# Altium PCB TSSOP_Adapt.PcbDoc
Units mm, origin at the board's own origin, x right, y up, seen from the top; angles counter-clockwise.
Board outline 152.4 x 101.6 mm, 2 copper layers (Top Layer, Bottom Layer); 2 components, 0 nets, 32 pads, 0 vias.
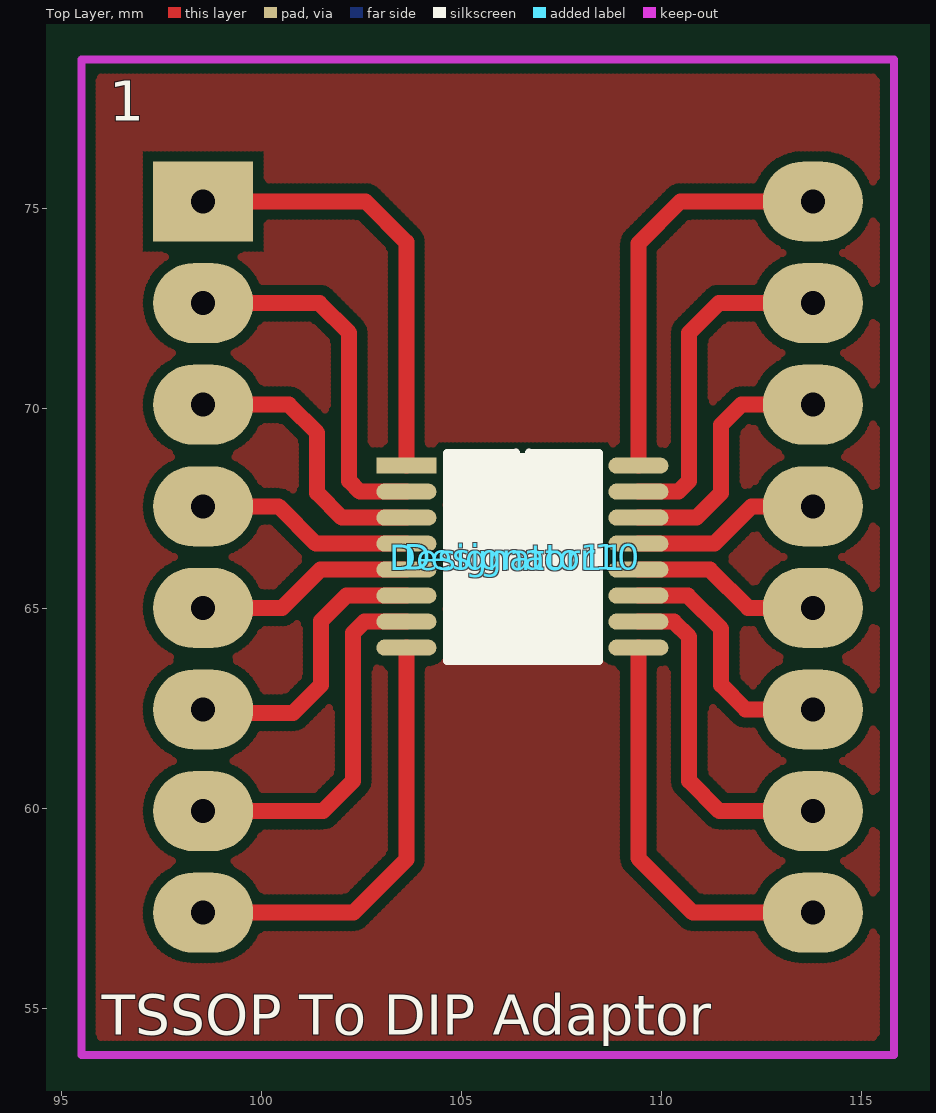
[diagram p0: Top Layer view]
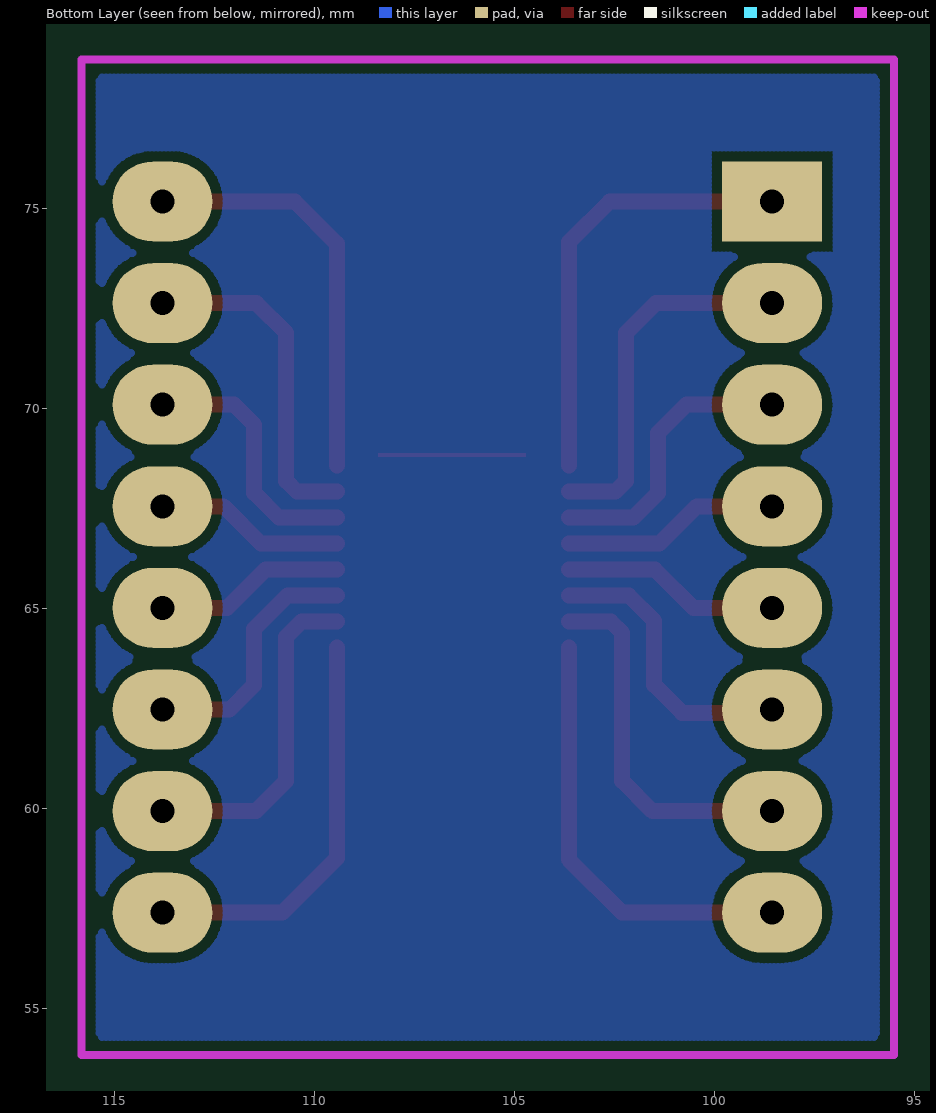
[diagram p1: Bottom Layer view, seen from below]

## Layer stack, top to bottom
Top Layer: signal copper 0.0356
Dielectric: dielectric 0.32, FR-4, Dk 4.8
Bottom Layer: signal copper 0.0356

## Board outline
25.4,25.4 177.8,25.4 177.8,127 25.4,127

## Design rules (kind name [scope] priority, off if disabled: settings)
Clearance [All] p1: gap=0.254
ComponentClearance [All] p1: gap=0.254 collisioncheckmode=0
PolygonConnect [All] p1: connectstyle=Relief reliefconductorwidth=0.254 reliefentries=4 polygonreliefangle="90 Angle"
RoutingLayers [All] p1: top layer=Horizontal bottom layer=Vertical
RoutingVias [All] p1: holewidth=0.711 width=1.27 viastyle="Through Hole" minholewidth=0.711 minwidth=1.27 maxholewidth=0.711 maxwidth=1.27
ShortCircuit [All] p1: allowed=TRUE
SolderMaskExpansion [All] p1: expansion=0.102
TestPointUsage [All] p1: valid=0 allowmultiple=FALSE
Testpoint [All] p1: side=15 testpointundercomponent=TRUE minsize=1.016 maxsize=2.54 preferedsize=1.524 minholesize=0 maxholesize=1.016 preferedholesize=0.813 testpointgrid=0.025 style=1023 order=-539222988
Width [All] p1: maxlimit=0.4 minlimit=0.2 preferedwidth=0.254 toplayer_prefwidth=0.4 bottomlayer_maxwidth=0.2 bottomlayer_prefwidth=0.2 minimp=50.000000 maximp=50.000000 favimp=50.000000
15 further rules are at their usual default settings.

## Components (designator, comment, footprint, x,y, rotation, side; value= is the part's Value field where it differs from the comment)
Designator10 "Comment" TSSOP16_RU-16 103.632,68.58 r0 top
Designator11 "Comment" DIP16-Adaptor 98.552,75.184 r0 top

## Footprints (in the part's own frame and the unit in brackets; to place one, negate y for a bottom-side part, rotate by r counter-clockwise, add the part's x,y. Pads: shape width x height; smd on the part's side, far side on the other; paste and mask are expansions set on the pad)
DIP16-Adaptor [mm]
  rect 2.5x2 hole 0.6: 1(0,0)
  oval 2.5x2 hole 0.6: 2(0,-2.54) 3(0,-5.08) 4(0,-7.62) 5(0,-10.16) 6(0,-12.7) 7(0,-15.24) 8(0,-17.78) 9(15.24,-17.78) 10(15.24,-15.24) 11(15.24,-12.7) 12(15.24,-10.16) 13(15.24,-7.62) 14(15.24,-5.08) 15(15.24,-2.54) 16(15.24,0)
TSSOP16_RU-16 [mm]
  rect 1.5x0.4 smd: 1(0,0)
  oval 1.5x0.4 smd: 2(0,-0.65) 3(0,-1.3) 4(0,-1.95) 5(0,-2.6) 6(0,-3.25) 7(0,-3.9) 8(0,-4.55) 9(5.8,-4.55) 10(5.8,-3.9) 11(5.8,-3.25) 12(5.8,-2.6) 13(5.8,-1.95) 14(5.8,-1.3) 15(5.8,-0.65) 16(5.8,0)
  silkscreen extent 1.01,-4.88 4.82,0.33

## Nets (pads, with @x,y where several pads share a name; then routed paths per layer and width w, separated by ;. In a path a pad name is that pad's centre, name@x,y a point inside that pad or via, vN(x,y) a via of type N, cw(c..) or ccw(c..) an arc to the next point about the centre after c; other vN are vias at no path point)
pads on no net: Designator10.1 Designator10.2 Designator10.3 Designator10.4 Designator10.5 Designator10.6 Designator10.7 Designator10.8 Designator10.9 Designator10.10 Designator10.11 Designator10.12 Designator10.13 Designator10.14 Designator10.15 Designator10.16 Designator11.1 Designator11.2 Designator11.3 Designator11.4 Designator11.5 Designator11.6 Designator11.7 Designator11.8 Designator11.9 Designator11.10 Designator11.11 Designator11.12 Designator11.13 Designator11.14 Designator11.15 Designator11.16
copper on no net: | length 125.7
  Top Layer w0.4: 98.4,62.4 100.8,62.4 101.5,63.1 101.5,64.7 102.13,65.33 103.632,65.33 ; 98.552,57.404 102.304,57.404 103.632,58.732 103.632,64.03 ; 98.552,59.944 101.544,59.944 102.3,60.7 102.3,64.4 102.58,64.68 103.632,64.68 ; 98.552,65.024 100.524,65.024 101.48,65.98 103.632,65.98 ; 98.552,67.564 100.436,67.564 101.37,66.63 103.632,66.63 ; 98.552,70.104 100.696,70.104 101.4,69.4 101.4,67.9 102.02,67.28 103.632,67.28 ; 98.552,72.644 101.456,72.644 102.2,71.9 102.2,68.2 102.47,67.93 103.632,67.93 ; 98.552,75.184 102.616,75.184 103.632,74.168 103.632,68.58 ; 109.432,64.03 109.432,58.768 110.796,57.404 113.792,57.404 ; 109.432,64.68 110.32,64.68 110.7,64.3 110.7,60.7 111.456,59.944 113.792,59.944 ; 109.432,65.33 110.67,65.33 111.5,64.5 111.5,63.1 112.116,62.484 113.792,62.484 ; 109.432,65.98 111.22,65.98 112.176,65.024 113.792,65.024 ; 109.432,66.63 111.33,66.63 112.264,67.564 113.792,67.564 ; 109.432,67.28 110.88,67.28 111.5,67.9 111.5,69.6 112.004,70.104 113.792,70.104 ; 109.432,67.93 110.43,67.93 110.7,68.2 110.7,71.9 111.444,72.644 113.792,72.644 ; 109.432,68.58 109.432,74.132 110.484,75.184 113.792,75.184

## Polygon pours and split planes (outlines as drawn)
no net on Top Layer (hatched 90Degree grid 0.1 track 0.2): 95.4,78.8 115.8,78.8 115.8,53.8 95.4,53.8
no net on Bottom Layer (hatched 90Degree grid 0.1 track 0.2): 95.4,78.8 115.9,78.8 115.9,53.8 95.4,53.8

## Keep-outs
Keep-Out Layer:
  lines w0.2: 95.504,53.848 115.824,53.848 115.824,78.74 95.504,78.74 95.504,53.848

## Other copper
Top Layer:
  rectangle: 104.7,68.8 108.4,68.9

## Silkscreen, mask and mechanical layers (free items; w line width, h text height)
Top Overlay:
  rectangle: 104.7,63.7 108.4,68.9
  text "1" at 96.2,77.2 h1
  text "TSSOP To DIP Adaptor" at 96.012,54.356 h1